# Altium PCB PCB_运放小电路_2022-01-30.pcbdoc
Units mm, origin at the board's own origin, x right, y up, seen from the top; angles counter-clockwise.
Board outline 100 x 140 mm, 2 copper layers (Top Layer, Bottom Layer); 50 components, 30 nets, 118 pads, 6 vias.
Unrouted connection lines stored in the file: 2.
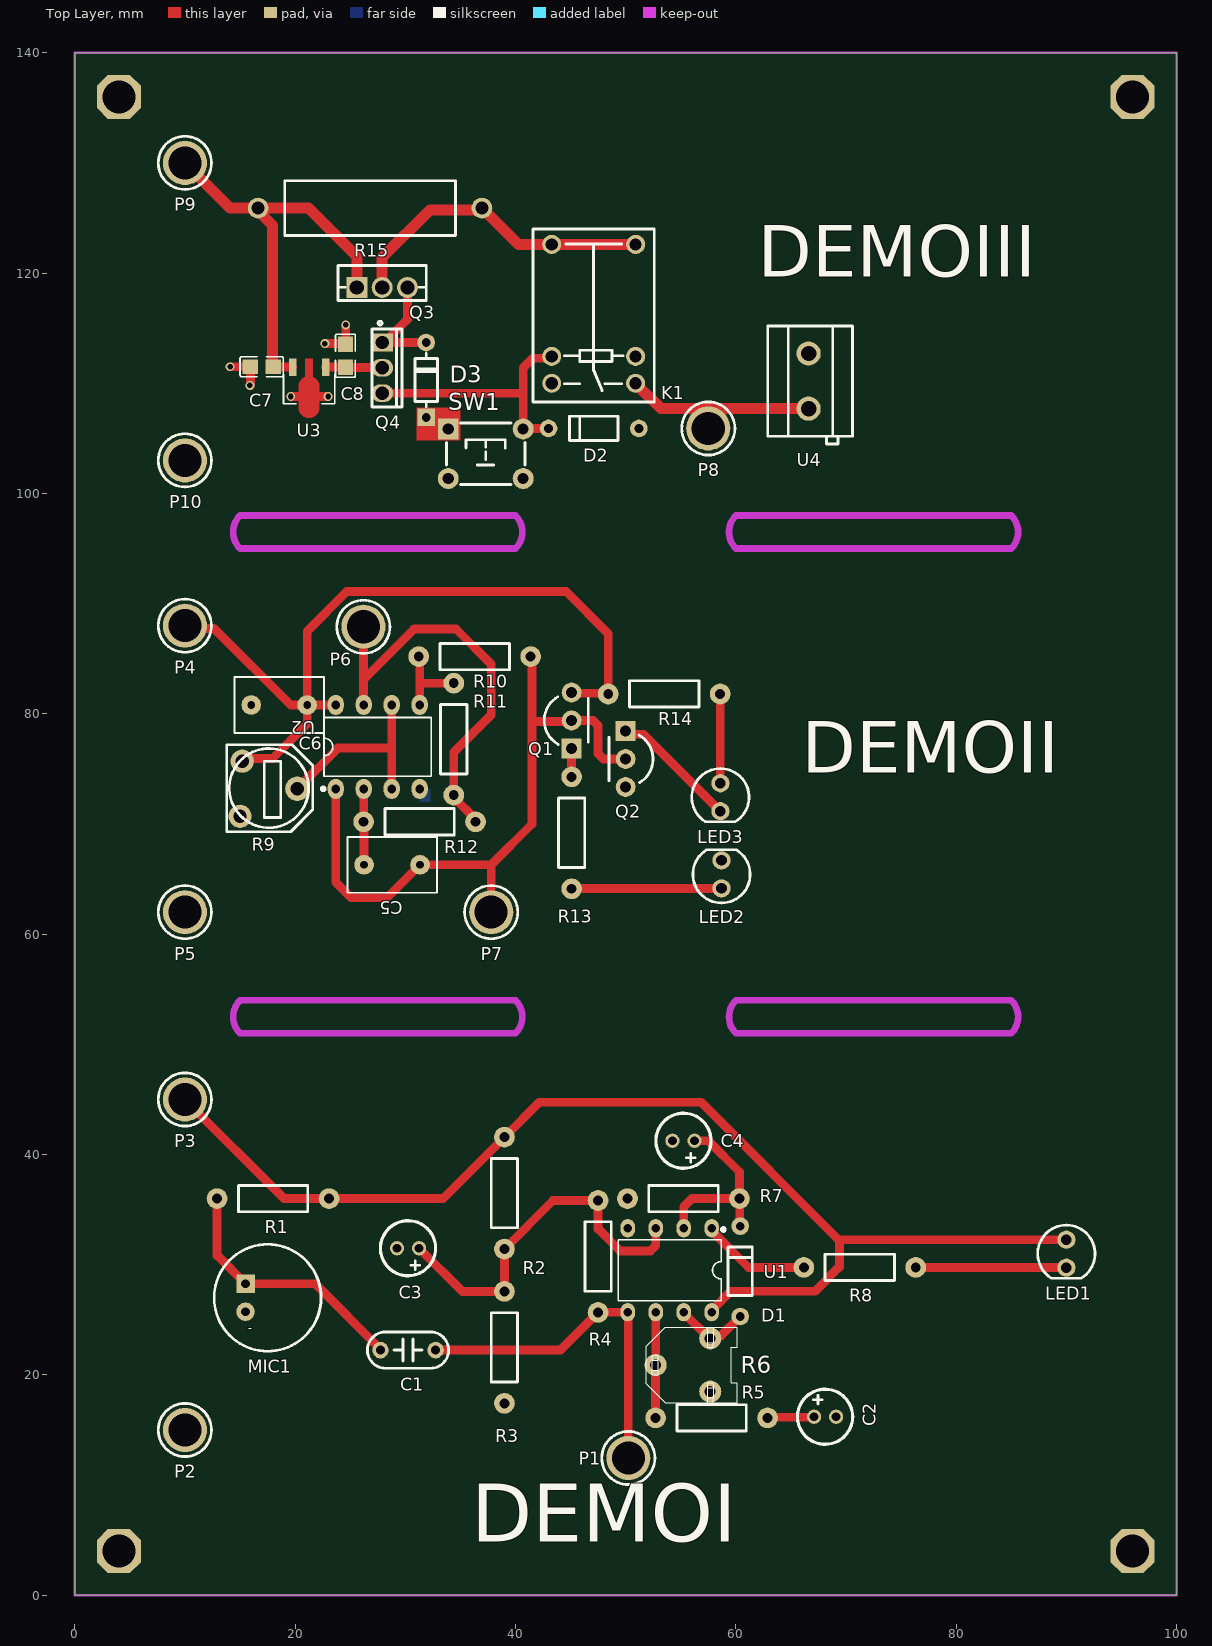
[diagram p0: Top Layer view]
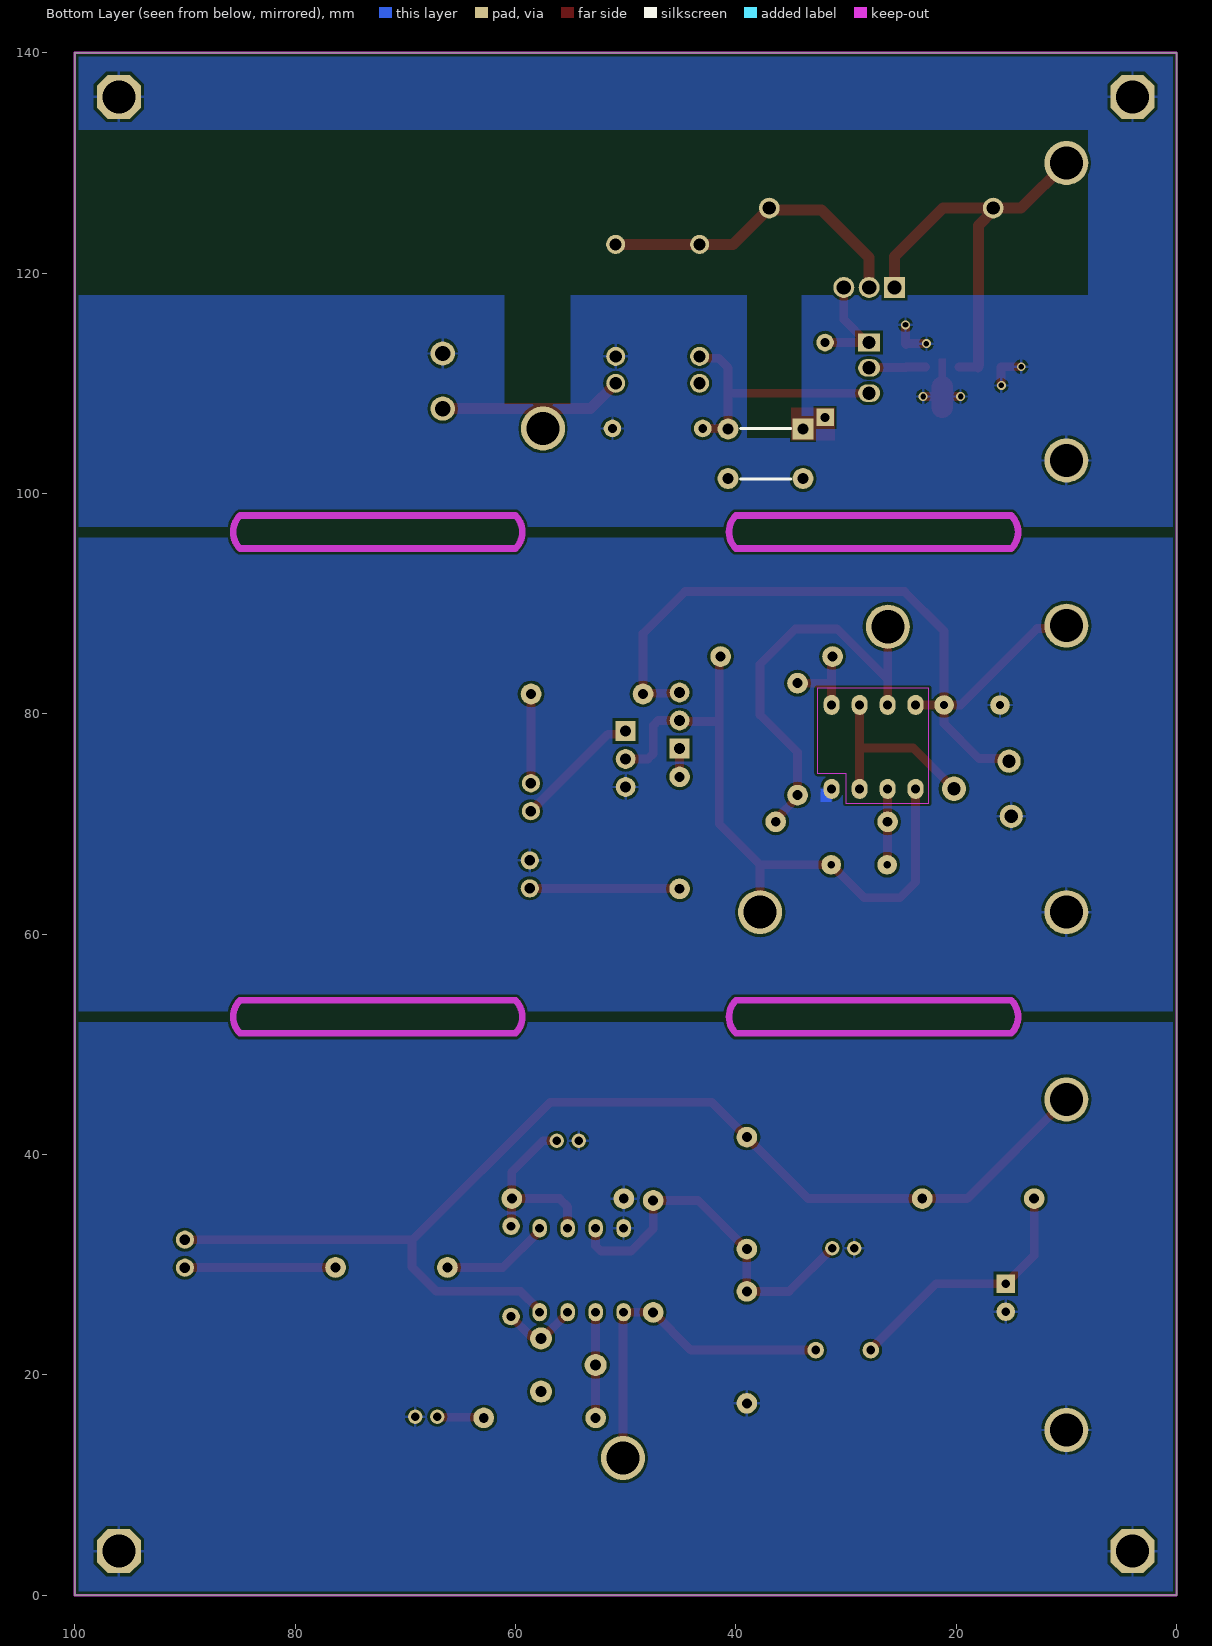
[diagram p1: Bottom Layer view, seen from below]

## Layer stack, top to bottom
Top Solder: solder mask 0.0102, Solder Resist, Dk 3.5
Top Layer: signal copper 0.0356
Dielectric1: dielectric 0.32, FR-4, Dk 4.8
Bottom Layer: signal copper 0.0356
Bottom Solder: solder mask 0.0102, Solder Resist, Dk 3.5

## Board outline
0,0 100,0 100,140 0,140

## Design rules (kind name [scope] priority, off if disabled: settings)
AssemblyTestPointUsage [All] p1 off:
AssemblyTestpoint [All] p1 off: testpointundercomponent=TRUE minsize=1.016 maxsize=2.54 preferedsize=1.524 minholesize=0 maxholesize=1.016 preferedholesize=0.813 testpointgrid=0.025 usegrid=TRUE gridtolerance=0 allowsidetop=TRUE allowsidebottom=TRUE
Clearance [All] p1: gap=0.254 ignorepadtopadclearanceinfootprint=TRUE except(0: Arc-Hole Track-Hole SMDPad-Hole THPad-Hole Via-Hole Fill-Hole Poly-Hole Region-Hole Text-Hole)
ComponentClearance [All] p1 off: gap=0.254 collisioncheckmode=3 verticalgap=0.254 showdistances=FALSE
DiffPairsRouting [All] p1 off: maxlimit=0.254 minlimit=0.254 mostfreqgap=0.254 toplayer_minwidth=0.381 toplayer_maxwidth=0.381 toplayer_prefwidth=0.381 bottomlayer_minwidth=0.381 bottomlayer_maxwidth=0.381 bottomlayer_prefwidth=0.381 maxuncoupledlength=12.7
FabricationTestPointUsage [All] p1 off: valid=0 allowmultiple=FALSE
FabricationTestpoint [All] p1 off: side=3 testpointundercomponent=TRUE minsize=1.016 maxsize=2.54 preferedsize=1.524 minholesize=0 maxholesize=1.016 preferedholesize=0.813 testpointgrid=0.025 allowsidetop=TRUE allowsidebottom=TRUE usegrid=TRUE gridtolerance=0
FanoutControl Fanout_BGA [IsBGA] p1 off: bgadir=Out bgaviamode=Centered fanoutstyle=Auto fanoutdirection=Alternating viagrid=0.025 // Fanout_BGA (Default Rule)
FanoutControl Fanout_LCC [IsLCC] p2 off: bgadir=Out bgaviamode=Centered fanoutstyle=Auto fanoutdirection=Alternating viagrid=0.025 // Fanout_LCC (Default Rule)
FanoutControl Fanout_SOIC [IsSOIC] p3 off: bgadir=Out bgaviamode=Centered fanoutstyle=Auto fanoutdirection=Alternating viagrid=0.025 // Fanout_SOIC (Default Rule)
FanoutControl Fanout_Small [(CompPinCount < 5)] p4 off: bgadir=Out bgaviamode=Centered fanoutstyle=Auto fanoutdirection=OutThenIn viagrid=0.025 // Fanout_Small (Default Rule)
FanoutControl Fanout_Default [All] p5 off: bgadir=Out bgaviamode=Centered fanoutstyle=Auto fanoutdirection=Alternating viagrid=0.025 // Fanout_Default (Default Rule)
Height [All] p1 off: minheight=0 maxheight=25.4 prefheight=12.7
HoleSize [All] p1 off: absolutevalues=TRUE maxlimit=2.54 minlimit=0.025 maxpercent=80.000 minpercent=20.000
HoleToHoleClearance [All] p1 off: gap=0.254 allowstackedmicrovias=TRUE
LayerPairs [All] p1 off: enforce=TRUE
MinimumSolderMaskSliver [All] p1 off: minsoldermaskwidth=0.254
NetAntennae [All] p1 off: netantennaetolerance=0
PasteMaskExpansion [All] p1 off: expansion=0
PlaneClearance [All] p1 off: clearance=0.508
PlaneConnect [All] p1 off: planeconnectstyle=Relief reliefexpansion=0.508 reliefentries=4 reliefconductorwidth=0.254 reliefairgap=0.254
PolygonConnect [All] p1: connectstyle=Relief reliefconductorwidth=0.254 reliefentries=4 polygonreliefangle="90 Angle" airgapwidth=0.254
RoutingCorners [All] p1 off: cornerstyle=45-Degree minsetback=2.54 maxsetback=2.54
RoutingLayers [All] p1 off: top layer_v5=TRUE bottom layer_v5=TRUE
RoutingPriority [All] p1 off: routingpriority=0
RoutingTopology [All] p1 off: topology=Shortest
RoutingVias [All] p1: holewidth=0.5 width=0.8 viastyle="Through Hole" minholewidth=0.5 minwidth=0.8 maxholewidth=0.5 maxwidth=0.8
ShortCircuit [All] p1 off: allowed=FALSE
SilkToSilkClearance [All] p1 off: silktosilkclearance=0.254
SilkToSolderMaskClearance [IsPad] p1 off: minsilkscreentomaskgap=0.254 clearancetoexposedcopper=TRUE
SolderMaskExpansion [All] p1 off: expansion=0.102 istentingtop=FALSE
UnRoutedNet [All] p1 off:
UnpouredPolygon [All] p1 off:
Width [All] p1: maxlimit=5 minlimit=0.6 preferedwidth=1
1 further rules are at their usual default settings.

## Components (designator, comment, footprint, x,y, rotation, side; value= is the part's Value field where it differs from the comment)
C1 "1u" "CBB 5*6.3*3" 30.25,22.25 r0 top
C2 "10u" ?#1 68.1,16.2 r0 top
C3 "10u" ?#1 30.25,31.5 r180 top
C4 "10u" ?#1 55.25,41.25 r180 top
C5 "105" RAD-0.2 28.8,66.3 r180 top
C6 "104" RAD-0.2 18.56,80.8 r180 top
C7 "0.33u" C0805 16.97,111.5 r0 top
C8 "0.1u" C0805 24.57,112.5 r270 top
D1 "1N4148" DO-35_BD2.0-L4.2-P8.20-D0.5-RD 60.4,29.4 r270 top
D2 "1N4007" DO-35_BD2.0-L4.2-P8.20-D0.5-RD 47.1,105.9 r0 top
D3 "1N4148" DO-35 31.9,110.3 r90 top
K1 "HK4100F-DC5V-SHG" RELAY-TH_HK4100F-DC5V-SHG 47.1,116.3 r90 top
LED1 "LED-TH-5mm_B" LED-TH_BD5.0_BLUE 90,31 r0 top
LED2 "LED-TH-5mm_B" LED-TH_BD5.0_BLUE 58.7,65.43 r180 top
LED3 "LED-TH-5mm_B" LED-TH_BD5.0_BLUE 58.6,72.43 r0 top
MIC1 "BL-MP9767P-34DB" MIC-TH_BD9.7-P2.54-D0.8-L-FD 15.5,27 r270 top
P1 "Port" ?#2 50.245,12.455 r0 top
P2 "Port" ?#2 10,15 r0 top
P3 "Port" ?#2 10,45 r0 top
P4 "Port" ?#2 10,88 r0 top
P5 "Port" ?#2 10,62 r0 top
P6 "Port" ?#2 26.2,87.9 r0 top
P7 "Port" ?#2 37.8,62 r0 top
P8 "Port" ?#2 57.5,105.9 r0 top
P9 "Port" ?#2 10,130 r0 top
P10 "Port" ?#2 10,103 r0 top
Q1 "8050" TO-92-3_L4.8-W3.7-P2.54-L 45.1,79.4 r90 top
Q2 "8550" TO-92-3_L4.8-W3.7-P2.54-L 50,75.9 r270 top
Q3 "8550" TO-126F-3L_L8.0-W3.2-P2.30-L 27.9,118.7 r0 top
Q4 "2N65" TO-251_L6.5-W2.3-P2.30-L 27.9,111.4 r270 top
R1 "10k" R_AXIAL-0.4 18,36 r0 top
R2 "10k" R_AXIAL-0.4 39,36.5 r90 top
R3 "10k" R_AXIAL-0.4 39,22.5 r90 top
R4 "100k" R_AXIAL-0.4 47.5,30.75 r270 top
R5 "1k" R_AXIAL-0.4 57.8,16.1 r180 top
R6 "504" pot3306F 55.9,20.9 r90 top
R7 "1M" R_AXIAL-0.4 55.25,36 r0 top
R8 "1k" R_AXIAL-0.4 71.25,29.75 r0 top
R9 "103" ?#3 15.2,75.699 r270 top
R10 "6k8" R_AXIAL-0.4 36.3,85.2 r0 top
R11 "10k" R_AXIAL-0.4 34.4,77.7 r90 top
R12 "1M" R_AXIAL-0.4 31.3,70.2 r180 top
R13 "200" R_AXIAL-0.4 45.1,69.2 r90 top
R14 "200" R_AXIAL-0.4 53.5,81.8 r180 top
R15 "0.8R 2W" R_AXIAL-0.8 26.8,125.9 r0 top
SW1 "TPS645-1NA43" "TSW DIP-6*6*6" 37.3,103.6 r0 top
U1 "LM358N_C434570" DIP-8_L9.2-W6.3-P2.54-LS7.62-BL 54,29.5 r180 top
U2 "NE5532P" DIP-8_L9.4-W6.4-P2.54-LS9.1-BL 27.5,77 r0 top
U3 "CJ78L05" SOT-89-3_L4.5-W2.5-P1.50-LS4.2-BR 21.27,110.1 r90 top
U4 "KF301-5.0-2P" CONN-TH_P5.00_KF301-5.0-2P 66.6,110.2 r270 top

## Footprints (in the part's own frame and the unit in brackets; to place one, negate y for a bottom-side part, rotate by r counter-clockwise, add the part's x,y. Pads: shape width x height; smd on the part's side, far side on the other; paste and mask are expansions set on the pad)
C0805 [mm]
  rect 1.41x1.35 smd: 1(-1.03,0) 2(1.03,0)
  silkscreen extent -1.96,-0.9 1.96,0.9
"CBB 5*6.3*3" [mm] "脚距5mm高6.3mm厚3mm"
  round 1.5 hole 0.8: 1(-2.5,0) 2(2.5,0)
  silkscreen extent -3.68,-1.65 3.68,1.65, body extent -3.15,-1.5 3.15,1.5, height 6.8
CONN-TH_P5.00_KF301-5.0-2P [mm]
  round 2.2 hole 1.4: 1(-2.5,0) 2(2.5,0)
  silkscreen extent -5,-3.7 5.71,4
DIP-8_L9.2-W6.3-P2.54-LS7.62-BL [mm]
  oval 1.32x1.65 hole 0.8: 1(-3.81,-3.81) 2(-1.27,-3.81) 3(1.27,-3.81) 4(3.81,-3.81) 5(3.81,3.81) 6(1.27,3.81) 7(-1.27,3.81) 8(-3.81,3.81)
  silkscreen extent -5.02,-3.85 4.68,2.76
DIP-8_L9.4-W6.4-P2.54-LS9.1-BL [mm]
  oval 1.46x1.825 hole 0.8: 1(-3.81,-3.81) 2(-1.27,-3.81) 3(1.27,-3.81) 4(3.81,-3.81) 5(3.81,3.81) 6(1.27,3.81) 7(-1.27,3.81) 8(-3.81,3.81)
  silkscreen extent -5.1,-3.96 4.87,2.67
DO-35 [mm] "1.8*6.8mm(直径，脚距）"
  rect 1.6x1.6 hole 0.8: 1(-3.4,0)
  round 1.6 hole 0.8: 2(3.4,0)
  silkscreen extent -2.41,-1.02 2.41,1.02, body extent -3.65,-0.9 3.65,0.9, height 1.85
DO-35_BD2.0-L4.2-P8.20-D0.5-RD [mm]
  round 1.6 hole 0.8: 1(-4.1,0) 2(4.1,0)
  silkscreen extent -2.2,-1.1 2.2,1.1
LED-TH_BD5.0_BLUE [mil]
  round 65 hole 38: 1(0,50) 2(0,-50)
  silkscreen extent -102,-88 102,102
MIC-TH_BD9.7-P2.54-D0.8-L-FD [mil]
  rect 66x66 hole 31.5: 1(-50,0)
  round 66 hole 31.5: 2(50,0)
  silkscreen extent -191,-112 191,270
pot3306F [mm]
  round 2 hole 1: 1(0,3.175) 2(-2.413,-1.778) 3(2.413,-1.778)
  silkscreen extent -3.41,-4.24 3.41,4.01, body extent -3.3,-4.19 3.51,4.06, height 7.62
R_AXIAL-0.4 [mil]
  round 74 hole 35.4: 1(-200,0) 2(200,0)
  silkscreen extent -124,-47 124,47
R_AXIAL-0.8 [mil]
  round 74 hole 47.2: 1(-400,0) 2(400,0)
  silkscreen extent -305,-98 305,98
RAD-0.2 [mil]
  round 70 hole 28: 1(100,0) 2(-100,0)
  silkscreen extent -160,-100 160,100
RELAY-TH_HK4100F-DC5V-SHG [mil]
  round 68 hole 43.31: 1(-248.05,150) 2(-248.05,-149.6) 3(-151.95,150) 4(-151.95,-149.7) 5(248.05,-150) 5(248.05,150)
  silkscreen extent -315,-217 303,217
SOT-89-3_L4.5-W2.5-P1.50-LS4.2-BR [mm]
  rect 1.575x0.672 smd: 1(1.356,-1.5) 3(1.356,1.5)
  Top Layer region: -2.283,0.959 -0.429,0.959 -0.384,0.958 -0.34,0.955 -0.296,0.949 -0.252,0.942 -0.208,0.933 -0.165,0.921 -0.123,0.908 -0.081,0.893 -0.04,0.875 0,0.856 0.04,0.835 0.078,0.812 0.115,0.788 0.151,0.761 0.185,0.733 0.219,0.704 0.251,0.673 0.281,0.64 0.31,0.606 0.337,0.571 0.362,0.534 0.386,0.497 0.408,0.458 0.428,0.418 0.447,0.339 2.144,0.339 2.144,-0.321 0.447,-0.321 0.428,-0.401 0.408,-0.44 0.386,-0.479 0.362,-0.517 0.337,-0.553 0.31,-0.588 0.281,-0.622 0.251,-0.655 0.219,-0.686 0.185,-0.716 0.151,-0.744 0.115,-0.77 0.078,-0.795 0.04,-0.818 0,-0.839 -0.04,-0.858 -0.081,-0.875 -0.123,-0.89 -0.165,-0.904 -0.208,-0.915 -0.252,-0.925 -0.296,-0.932 -0.34,-0.937 -0.384,-0.94 -0.429,-0.941 -2.283,-0.941 -2.328,-0.94 -2.372,-0.937 -2.416,-0.932 -2.46,-0.925 -2.504,-0.915 -2.547,-0.904 -2.589,-0.89 -2.631,-0.875 -2.672,-0.858 -2.713,-0.839 -2.752,-0.818 -2.79,-0.795 -2.827,-0.77 -2.863,-0.744 -2.898,-0.716 -2.931,-0.686 -2.963,-0.655 -2.993,-0.622 -3.022,-0.588 -3.049,-0.553 -3.075,-0.517 -3.098,-0.479 -3.12,-0.44 -3.141,-0.401 -3.159,-0.36 -3.175,-0.318 -3.189,-0.276 -3.202,-0.233 -3.212,-0.19 -3.22,-0.146 -3.227,-0.102 -3.231,-0.058 -3.233,-0.013 -3.233,0.031 -3.231,0.076 -3.227,0.12 -3.22,0.164 -3.212,0.208 -3.202,0.251 -3.189,0.294 -3.175,0.336 -3.159,0.377 -3.141,0.418 -3.12,0.458 -3.098,0.497 -3.075,0.534 -3.049,0.571 -3.022,0.606 -2.993,0.64 -2.963,0.673 -2.931,0.704 -2.898,0.733 -2.863,0.761 -2.827,0.788 -2.79,0.812 -2.752,0.835 -2.713,0.856 -2.672,0.875 -2.631,0.893 -2.589,0.908 -2.547,0.921 -2.504,0.933 -2.46,0.942 -2.416,0.949 -2.372,0.955 -2.328,0.958
  silkscreen extent -1.95,-2.33 0.7,2.33
TO-92-3_L4.8-W3.7-P2.54-L [mm]
  rect 1.8x1.8 hole 1: 1(-2.54,0)
  round 1.8 hole 1: 2(0,0) 3(2.54,0)
  silkscreen extent -2.17,-1.5 2.14,2.48
TO-126F-3L_L8.0-W3.2-P2.30-L [mm]
  rect 1.9x1.9 hole 1.3: 1(-2.3,0)
  round 1.9 hole 1.3: 2(0,0) 3(2.3,0)
  silkscreen extent -4,-1.2 4,2
TO-251_L6.5-W2.3-P2.30-L [mm]
  rect 1.6x2 hole 1.2: 1(-2.3,0)
  oval 1.6x2 hole 1.2: 2(0,0) 3(2.3,0)
  silkscreen extent -4.23,-0.91 3.54,1.8
"TSW DIP-6*6*6" [mm] "6*6*6mm"
  rect 1.9x1.9 hole 1: 1(-3.4,2.25)
  round 1.9 hole 1: 2(-3.4,-2.25) 3(3.4,-2.25) 4(3.4,2.25)
  silkscreen extent -3.56,-2.79 3.56,2.79, body extent -4.11,-3 4.11,3, height 5.95
?#1 [mm]
  round 1.3 hole 0.8: 1(-1,0) 2(1,0)
  silkscreen extent -2.5,-2.5 2.5,2.5
?#2 [mm]
  round 4 hole 3: 1(0,0)
  silkscreen extent -2.41,-2.41 2.41,2.41
?#3 [mm]
  round 2.1 hole 1.2: 1(0,0) 3(4.999,-0.2)
  round 2.2 hole 1.2: 2(2.499,5)
  silkscreen extent -1.5,-1.4 6.4,6.4

## Free pads (board coordinates)
  oct 4x4 hole 3: ""(4,4) ""(4,136) ""(96,4) ""(96,136)

## Via types
v1: diameter 0.8, hole 0.5, Top Layer to Bottom Layer, 6 vias

## Nets (pads, with @x,y where several pads share a name; then routed paths per layer and width w, separated by ;. In a path a pad name is that pad's centre, name@x,y a point inside that pad or via, vN(x,y) a via of type N, cw(c..) or ccw(c..) an arc to the next point about the centre after c; other vN are vias at no path point)
GND1: C2.2 C3.2 C4.2 MIC1.2 P2.1 pad.@4,4 pad.@96,4 R3.1 R7.1 U1.4
GND2: C6.1 LED2.2 P5.1 Q2.3 R9.3 U2.4
GND3: C7.1 C8.1 D2.2 K1.4 P10.1 pad.@4,136 pad.@96,136 U4.1 | length 10.6
  Top Layer w0.8: v1(14.1,111.5) C7.1 15.94,109.84 v1(15.9,109.8) ; v1(19.6,108.8) v1(23,108.8) ; v1(22.7,113.6) 24.5,113.6 C8.1 24.6,113.56 v1(24.6,115.3)
NetC1_1: C1.1 MIC1.1 R1.1 | length 23.6
  Top Layer w0.8: R1.1 12.92,30.85 MIC1.1 21.83,28.27 C1.1@27.8,22.3
NetC1_2: C1.2 P1.1 R4.2 U1.5 | length 32.1
  Top Layer w0.8: C1.2 44.08,22.25 R4.2 47.51,25.68 50.18,25.68 U1.5 50.245,25.635 P1.1
NetC2_1: C2.1 R5.1 | length 4.3
  Top Layer w0.8: R5.1 62.93,16.15 67.05,16.15 C2.1
NetC3_1: C3.1 R2.1 R3.2 R4.1 U1.3 | length 34
  Top Layer w0.8: C3.1 35.17,27.58 R3.2 R2.1 43.41,35.83 R4.1 47.5,33.25 49.5,31.25 52.25,31.25 52.73,31.73 U1.3
NetC4_1: C4.1 D1.1 R7.2 U1.2 | length 17.5
  Top Layer w0.8: U1.2 55.27,35.27 56,36 R7.2 ; C4.1 57.5,41.25 60.33,38.42 R7.2 ; D1.1 60.365,33.535 60.365,35.965 R7.2
NetC5_1: C5.1 R12.2 U2.2 | length 6.9
  Top Layer w0.8: U2.2 26.225,73.185 26.225,70.205 R12.2 26.24,70.18 26.24,66.32 C5.1
NetC5_2: C5.2 P7.1 Q1.2 Q2.2 R10.2 U2.1 | length 60.7
  Top Layer w0.8: U2.1 23.69,64.71 25.1,63.3 28.34,63.3 C5.2 37.8,66.3 ; P7.1 37.8,66.3 ; R10.2 41.5,85.08 41.5,79.3 ; Q2.2 47.969,75.9 47.5,76.369 47.5,78.931 47.031,79.4 Q1.2 45,79.3 41.5,79.3 ; 37.8,66.3 41.5,70 41.5,79.3
NetC8_2: C8.2 Q4.2 U3.1 | length 5.2
  Top Layer w0.8: U3.1 22.777,111.463 24.563,111.463 24.591,111.435 27.865,111.435 Q4.2
NetD1_2: D1.2 R6.3 U1.7 | length 7
  Top Layer w0.8: U1.7 55.27,25.623 57.58,23.313 R6.3 57.908,23.543 58.643,23.543 D1.2
NetD2_1: D2.1 K1.3 Q4.3 SW1.3 SW1.4 | length 23.6
  Top Layer w0.8: Q4.3 40.6,109.1 ; SW1.4 SW1.4@40.7,105.9 ; D2.1 SW1.4@40.7,105.9 ; K1.3 43.113,112.263 41.563,112.263 40.7,111.4 SW1.4@40.7,105.9
NetD3_1: D3.2 Q3.3 Q4.1 | length 9.9
  Top Layer w0.8: Q4.1 Q4.1@28.1,113.7 ; Q3.3 30.2,115.8 Q4.1@28.1,113.7 ; D3.2 Q4.1@28.1,113.7
NetD3_2: D3.1 SW1.1 SW1.2
NetK1_2: K1.2 P8.1 U4.2 | length 16.7
  Top Layer w1: K1.2 53.199,107.7 U4.2
NetK1_5: K1.5 Q3.2 R15.2 | length 28.9
  Top Layer w1: Q3.2 27.9,121.4 32.232,125.732 36.792,125.732 R15.2 40.26,122.6 43.29,122.6 K1.5@50.91,122.6
NetLED1_2: LED1.2 R8.2 | length 13.7
  Top Layer w0.8: R8.2 76.34,29.74 89.99,29.74 LED1.2
NetLED2_1: LED2.1 R13.1 | length 13.6
  Top Layer w0.8: R13.1 45.12,64.14 58.68,64.14 LED2.1
NetLED3_1: LED3.1 R14.1 | length 8.1
  Top Layer w0.8: R14.1 58.59,81.79 58.59,73.71 LED3.1
NetLED3_2: LED3.2 Q2.1 | length 11.6
  Top Layer w0.8: Q2.1 50.289,78.151 51.609,78.151 LED3.2
NetP6_1: P6.1 R11.1 R12.1 U2.7 | length 38.2
  Top Layer w0.8: P6.1 26.215,87.885 26.215,83.3 26.215,80.825 U2.7 ; 26.4,83.3 30.8,87.7 34.6,87.7 37.8,84.5 37.8,79.9 34.4,76.5 R11.1 34.4,72.4 36.38,70.42 R12.1
NetQ1_1: Q1.1 R13.2 | length 2.6
  Top Layer w0.8: R13.2 Q1.1
NetR5_2: R5.2 R6.1 U1.6 | length 9.6
  Top Layer w0.8: R5.2 52.723,16.103 52.723,20.897 R6.1 52.725,25.685 U1.6
NetR8_1: R8.1 U1.1 | length 10
  Top Layer w0.8: U1.1 57.81,33.09 61.15,29.75 R8.1
NetR9_2: R9.2 U2.3 U2.6 | length 17.7
  Top Layer w0.8: R9.2 23.9,76.9 28.77,76.9 ; U2.3 28.77,76.9 ; U2.6 28.77,76.9
NetR10_1: R10.1 R11.2 U2.5 | length 7.5
  Top Layer w0.8: R10.1 31.315,85.105 31.315,82.78 ; U2.5 31.315,80.815 31.315,82.78 ; R11.2 31.315,82.78
VCC1: LED1.1 P3.1 R1.2 R2.2 U1.8 | length 108.3
  Top Layer w0.8: P3.1 19,36 R1.2 33.42,36 R2.2 42.17,44.75 56.85,44.75 69.4,32.2 69.4,29.8 67.2,27.6 59.555,27.6 57.98,26.025 57.98,25.86 U1.8 ; 69.4,32.27 LED1.1
VCC2: C6.2 P4.1 Q1.3 R9.1 R14.2 U2.8 | length 71.5
  Top Layer w0.8: P4.1 10.263,87.737 12.663,87.737 19.6,80.8 C6.2 ; R9.1 15.449,75.948 17.948,75.948 21.1,79.1 C6.2 ; C6.2@21.1,80.9 21.1,87.5 24.7,91.1 44.6,91.1 48.42,87.28 R14.2 48.35,81.87 45.17,81.87 Q1.3 ; U2.8 23.685,80.805 21.105,80.805 C6.2
VCC3: C7.2 P9.1 Q3.1 R15.1 U3.3 | length 38.7
  Top Layer w0.8: C7.2 18.022,111.478 19.748,111.478 U3.3
  Top Layer w1: P9.1 14.1,125.9 R15.1 ; C7.2 18,111.645 17.97,111.675 17.97,124.332 16.64,125.662 R15.1 ; Q3.1 25.6,121.5 21.2,125.9 R15.1
pads on no net: K1.1 R6.2

## Polygon pours and split planes (outlines as drawn)
GND1 on Bottom Layer "NONET_L-01_P-001" (solid, remove dead copper, pour order 0): 0,0 100,0 100,52 0,52
GND3 on Bottom Layer "NONET_L-01_P-001" (solid, remove dead copper, pour order 3): 0,97 100,97 100,118 61,118 61,108.1 55,108.1 55,118 39,118 39,105 34,105 34,118 8,118 8,133 100,133 100,140 0,140
GND2 on Bottom Layer "NONET_L-01_P-001" (solid, remove dead copper, pour order 1): 0,96 0,53 100,53 100,96

## Keep-outs
Bottom Layer:
  region net NetC1_1: 22.5,82.3 32.6,82.3 32.6,74.6 30,74.6 30,71.9 22.5,71.9
Keep-Out Layer:
  lines w0.2: 0,0 100,0 100,140 0,140 0,0
  lines w0.6: 15,51 cw(c16.5,52.5) 15,54 40,54 cw(c38.5,52.5) 40,51 15,51 ; 15,95 cw(c16.5,96.5) 15,98 40,98 cw(c38.5,96.5) 40,95 15,95 ; 60,51 cw(c61.5,52.5) 60,54 85,54 cw(c83.5,52.5) 85,51 60,51 ; 60,95 cw(c61.5,96.5) 60,98 85,98 cw(c83.5,96.5) 85,95 60,95

## Other copper
Top Layer:
  rectangle net NetD3_2: 31,104.8 35,107.8
Bottom Layer:
  rectangle net GND2: 31.31,72 32.302,73.19

## Silkscreen, mask and mechanical layers (free items; w line width, h text height)
Top Overlay:
  text "DEMOIII" at 62,118.119 h8
  text "DEMOII" at 66,73.119 h8
  text "DEMOI" at 36,3.133 h9
Mechanical 1:
  lines w0.5: 15,51 cw(c16.5,52.5) 15,54 40,54 cw(c38.5,52.5) 40,51 15,51 ; 15,95 cw(c16.5,96.5) 15,98 40,98 cw(c38.5,96.5) 40,95 15,95 ; 60,51 cw(c61.5,52.5) 60,54 85,54 cw(c83.5,52.5) 85,51 60,51 ; 60,95 cw(c61.5,96.5) 60,98 85,98 cw(c83.5,96.5) 85,95 60,95

## Dimensions
100,140 to 100,0 on Document
0,0 to 100,0 on Document

## Text inside footprints (layer, text, board x,y; h text height)
MIC1: Top Overlay "-" at 16.11,24.46 h0.76 r180